# Altium PCB TPS7333Q Break Out.PcbDoc
Units mil, origin at the board's own origin, x right, y up, seen from the top; angles counter-clockwise.
Board outline 970 x 310 mil, 2 copper layers (Top Layer, Bottom Layer); 8 components, 5 nets, 22 pads, 1 vias.
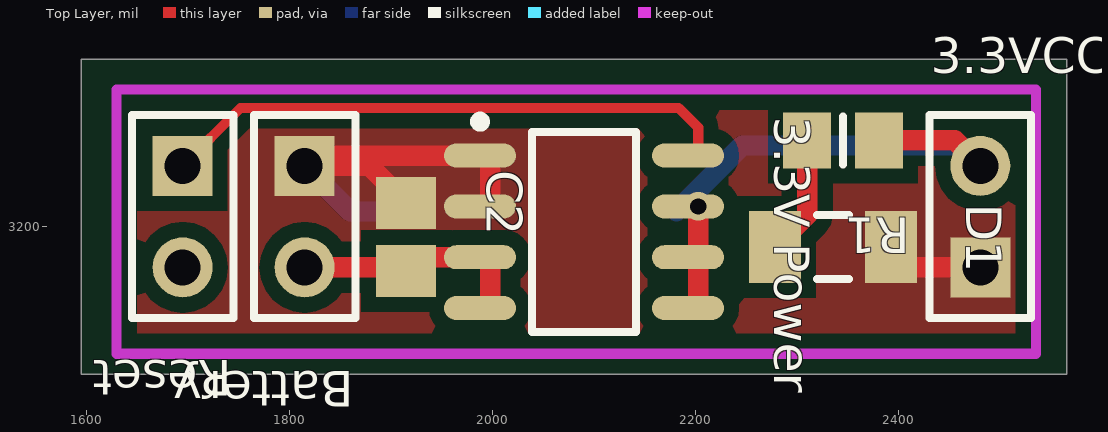
[diagram p0: Top Layer view]
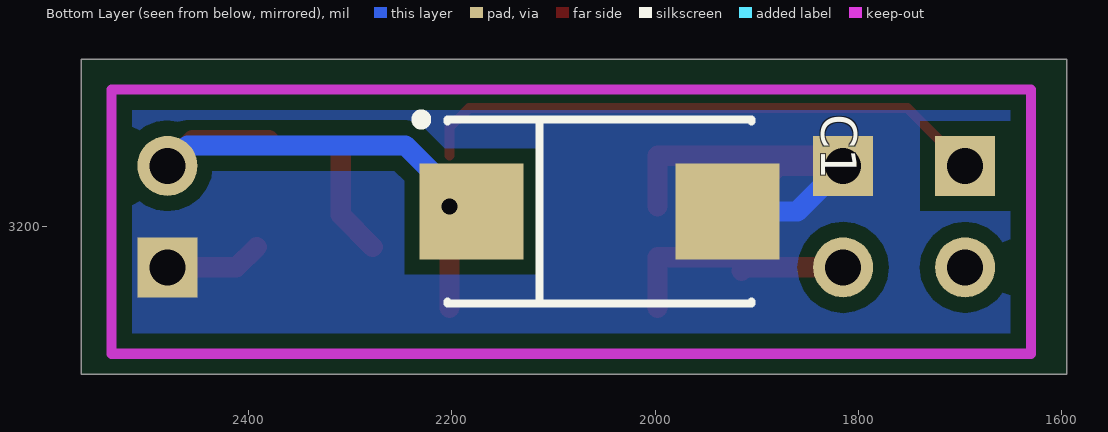
[diagram p1: Bottom Layer view, seen from below]

## Layer stack, top to bottom
Top Layer: signal copper 1.4
Dielectric: dielectric 12.6, FR-4, Dk 4.8
Bottom Layer: signal copper 1.4

## Board outline
1595,3055 2565,3055 2565,3365 1595,3365

## Design rules (kind name [scope] priority, off if disabled: settings)
Clearance "Polygon Clearance" [InPolygon] p1: gap=15
Clearance [All] p2: gap=8.1
HoleSize [All] p1: absolutevalues=TRUE maxlimit=100 minlimit=16 maxpercent=80.000 minpercent=20.000
MinimumAnnularRing [All] p1: minimumring=6
PolygonConnect [All] p1: connectstyle=Direct reliefconductorwidth=10 reliefentries=4 polygonreliefangle="90 Angle"
RoutingVias [All] p1: holewidth=16 width=28 viastyle="Through Hole" minholewidth=16 minwidth=27 maxholewidth=16 maxwidth=35
SilkscreenOverComponentPads [All] p1: minsilkscreentomaskgap=10
SolderMaskExpansion [All] p1: expansion=4
Width [All] p1: maxlimit=50 minlimit=8 preferedwidth=8
26 further rules are at their usual default settings.

## Components (designator, comment, footprint, x,y, rotation, side; value= is the part's Value field where it differs from the comment)
"3.3V Power Source" "TPS7333Q" SOIC127P600-8BN 2090,3195 r0 top
3.3VCC "Header 2" HDR1X2 2480,3160 r90 top
Battery "Header 2" HDR1X2 1815,3260 r270 top
C1 "Cap Pol1" TC7343-2917 2055,3215 r180 bottom
C2 "Cap Semi" CAPC2012N 1915,3190 r270 top
D1 "LED2" RESC3216N 2335,3180 r0 top
R1 "Res3" RESC2012N 2345,3285 r180 top
Reset "Header 2" HDR1X2 1695,3260 r270 top

## Footprints (in the part's own frame and the unit in brackets; to place one, negate y for a bottom-side part, rotate by r counter-clockwise, add the part's x,y. Pads: shape width x height; smd on the part's side, far side on the other; paste and mask are expansions set on the pad)
CAPC2012N [mm] "Chip Capacitor, Body 2.0x1.3mm, IPC Medium Density"
  rect 1.3x1.5 smd: 1(-0.85,0) 2(0.85,0)
  body extent -1.1,-0.72 1.1,0.72, height 1.1
HDR1X2 [mm] "Connector; Header; 2 Position"
  rect 1.5x1.5 hole 0.9: 1(0,0)
  round 1.5 hole 0.9: 2(2.54,0)
  silkscreen extent -1.27,-1.27 3.81,1.27
RESC2012N [mm] "Chip Resistor, Body 2.0x1.3mm, IPC Medium Density"
  rect 1.2x1.4 smd: 1(-0.9,0) 2(0.9,0)
  silkscreen extent 0,-0.6 0,0.6, body extent -1.07,-0.7 1.07,0.7, height 0.65
RESC3216N [mm] "Chip Resistor, Body 3.2x1.6mm, IPC Medium Density"
  rect 1.3x1.8 smd: 1(-1.45,0) 2(1.45,0)
  silkscreen extent -0.4,-0.8 0.4,0.8, body extent -1.68,-0.87 1.68,0.87, height 0.71
SOIC127P600-8BN [mm] "SOIC, 8-Leads, Body 4.9x3.9mm, Pitch 1.27mm, IPC Medium Density"
  oval 1.8x0.6 smd: 1(-2.6,1.905) 2(-2.6,0.635) 3(-2.6,-0.635) 4(-2.6,-1.905) 5(2.6,-1.905) 6(2.6,-0.635) 7(2.6,0.635) 8(2.6,1.905)
  silkscreen extent -2.72,-2.5 1.3,2.88, body extent -2,-2.5 2,2.5, height 2.59
TC7343-2917 [mm] "Capacitor, SM Tantalum; Body 7.3 x 4.3 mm (LxW typ)"
  rect 2.6x2.4 smd: 1(-3.2,0) 2(3.2,0)
  silkscreen extent -4.58,-2.3 3.8,2.42

## Part data
3.3VCC Battery Reset: "Header, 2-Pin"
C1: "Polarized Capacitor (Radial)"
C2: "Capacitor (Semiconductor SIM Model)"
D1: "Typical RED, GREEN, YELLOW, AMBER GaAs LED"
R1: "Resistor"

## Via types
v1: diameter 28, hole 16, Top Layer to Bottom Layer, 1 vias

## Nets (pads, with @x,y where several pads share a name; then routed paths per layer and width w, separated by ;. In a path a pad name is that pad's centre, name@x,y a point inside that pad or via, vN(x,y) a via of type N, cw(c..) or ccw(c..) an arc to the next point about the centre after c; other vN are vias at no path point)
3.3VCC: 3.3VCC.2 "3.3V Power Source.5" "3.3V Power Source.6" "3.3V Power Source.7" C1.1 R1.1 | length 554.1
  Top Layer w20: v1@2192.36,3220 v1(2202.36,3220) 2202.36,3120 ; R1.1 2455,3285 3.3VCC.2
  Bottom Layer w20: C1.1 2245.98,3280 2460,3280 3.3VCC.2
GND: 3.3VCC.1 "3.3V Power Source.1" "3.3V Power Source.2" Battery.1 C1.2 C2.1 D1.2 | length 580.8
  Top Layer w20: C2.1 1878.46,3260 Battery.1 1825,3270 1987.64,3270 1997.64,3270 1997.64,3220 ; D1.2 2412.09,3160 3.3VCC.1
  Bottom Layer w20: Battery.1 1860,3215 C1.2
"Net3.3V Power Source_8": "3.3V Power Source.8" Reset.1 | length 566.5
  Top Layer w10: Reset.1 1751.9,3316.9 2183.1,3316.9 2202.36,3297.64 2202.36,3270
NetD1_1: D1.1 R1.2 | length 103.1
  Top Layer w20: D1.1 2309.57,3211.65 R1.2@2309.57,3270
VIN: "3.3V Power Source.3" "3.3V Power Source.4" Battery.2 C2.2 | length 227.5
  Top Layer w20: Battery.2 1911.54,3160 C2.2 ; C2.2@1921.54,3170 1987.64,3170 1997.64,3170 1997.64,3120
pads on no net: Reset.2

## Polygon pours and split planes (outlines as drawn)
GND on Bottom Layer (solid, pour order 4): 1605,3350 1605,3065 2550,3065 2550,3350
GND on Top Layer "Top Layer-GND" (solid, pour order 2): 1605,3350 1605,3065 2550,3065 2550,3350

## Keep-outs
Keep-Out Layer:
  lines w10: 1630,3075 2535,3075 2535,3335 1630,3335 1630,3075

## Silkscreen, mask and mechanical layers (free items; w line width, h text height)
Drill Drawing:
  text ".LEGEND" at 2765,3200 h60
  text "Drill Drawing." at 2765,3100 h60

## Dimensions
1630,3075 to 2535,3075 on Mechanical 1
1630,3075 to 1630,3335 on Mechanical 1